# Altium PCB link_pcb_3.PcbDoc
Units mil, origin at the board's own origin, x right, y up, seen from the top; angles counter-clockwise.
Board outline 1980 x 700 mil, 2 copper layers (Top Layer, Bottom Layer); 38 components, 29 nets, 108 pads, 24 vias.
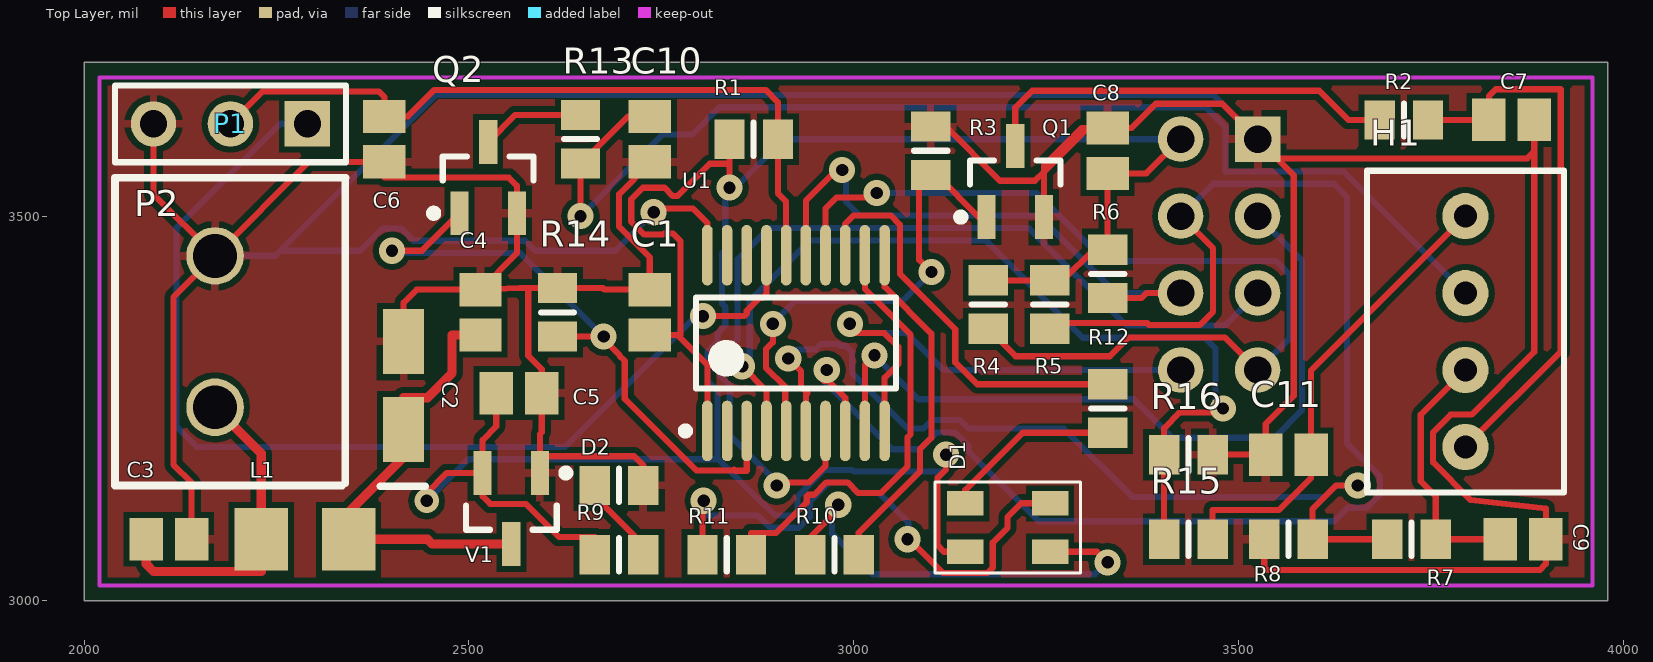
[diagram p0: Top Layer view]
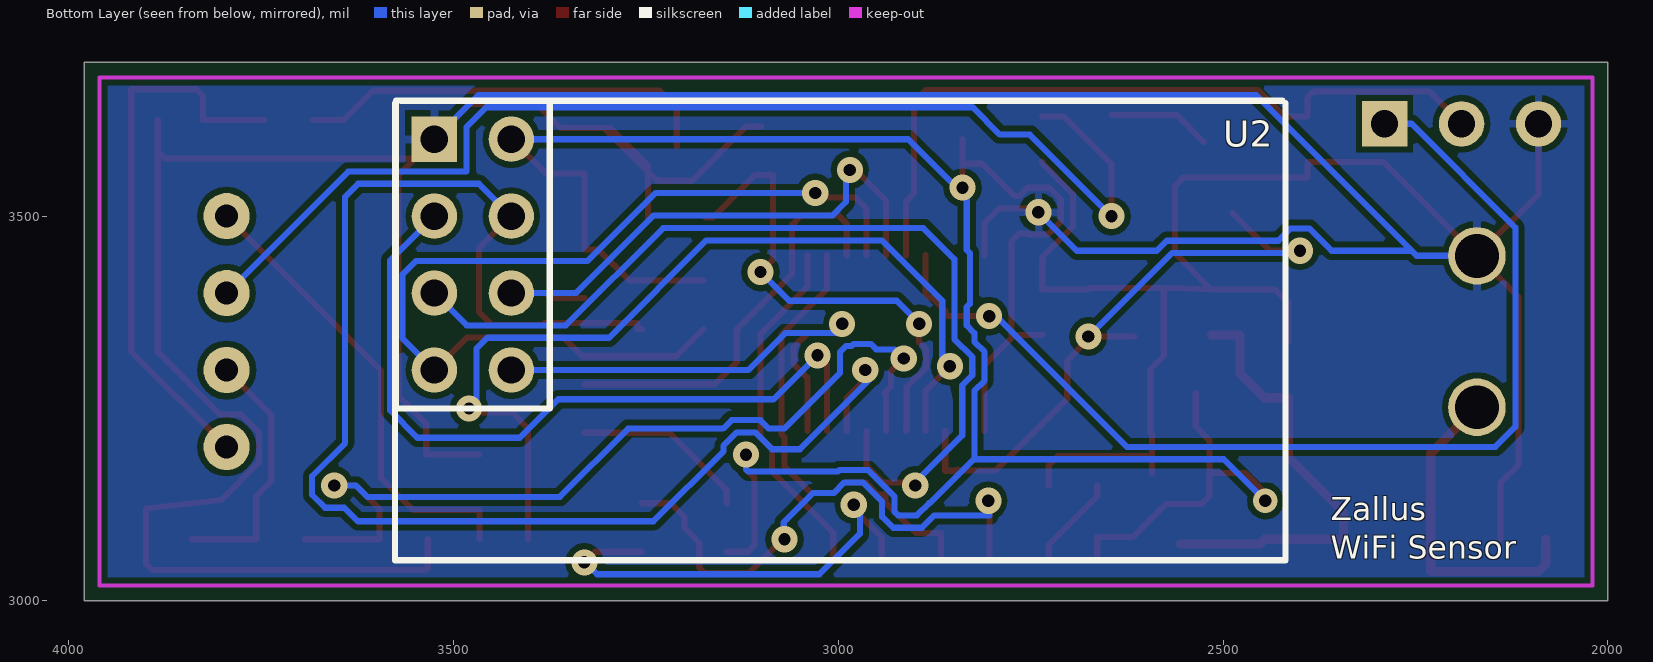
[diagram p1: Bottom Layer view, seen from below]

## Layer stack, top to bottom
Top Layer: signal copper 1.4
Dielectric: dielectric 12.6, FR-4, Dk 4.8
Bottom Layer: signal copper 1.4

## Board outline
2000,3000 3980,3000 3980,3700 2000,3700

## Design rules (kind name [scope] priority, off if disabled: settings)
Clearance [All] p1: gap=8
HoleToHoleClearance [All] p1: gap=20 allowstackedmicrovias=TRUE
MinimumSolderMaskSliver [All] p1: minsoldermaskwidth=6
PolygonConnect [All] p1: connectstyle=Relief reliefconductorwidth=10 reliefentries=4 polygonreliefangle="90 Angle"
RoutingVias [All] p1: holewidth=16 width=34 viastyle="Through Hole" minholewidth=28 minwidth=50 maxholewidth=28 maxwidth=50
SilkToSilkClearance [All] p1: silktosilkclearance=0
SilkscreenOverComponentPads [All] p1: minsilkscreentomaskgap=0
SolderMaskExpansion SolderMaskExpansion_1 [InComponent('U1')] p1: expansion=6
SolderMaskExpansion [All] p2: expansion=4
Width [InNet('VP1_REG')] p1: maxlimit=12 minlimit=10 preferedwidth=12 minimp=50.000000 maximp=50.000000 favimp=50.000000
Width Width_3 [InNet('VP1')] p2: maxlimit=12 minlimit=10 preferedwidth=12 minimp=50.000000 maximp=50.000000 favimp=50.000000
Width Width_2 [InNet('LSD02_OUT')] p3: maxlimit=8 minlimit=8 preferedwidth=8
Width Width_5 [InNet('EXTERNAL_SW')] p4: maxlimit=8 minlimit=8 preferedwidth=8
Width Width_4 [InNet('3.3V')] p5: maxlimit=8 minlimit=8 preferedwidth=8
Width Width_1 [All] p6: maxlimit=20 minlimit=6 preferedwidth=8 minimp=50.000000 maximp=50.000000 favimp=50.000000
24 further rules are at their usual default settings.

## Components (designator, comment, footprint, x,y, rotation, side; value= is the part's Value field where it differs from the comment)
C1 "Cap" C0805 2735,3375 r270 top
C2 "Cap Pol1" 1206_C 2415,3280 r90 top
C3 "Cap" C0805 2110,3080 r180 top
C4 "Cap" C0805 2515,3375 r270 top
C5 "Cap" C0805 2565,3270 r180 top
C6 "Cap" C0805 2390,3600 r90 top
C7 "Cap" C0805 3855,3625 r180 top
C8 "Cap" C0805 3330,3585 r270 top
C9 "Cap" C0805 3870,3080 r180 top
C10 "Cap" C0805 2735,3600 r90 top
C11 "Cap" C0805 3565,3190 r0 top
D1 "SMT RGB LED" CLV1A-FKB_RGB 3145,3115 r0 top
D2 "LED3" 6-0805_L 2695,3150 r0 top
H1 "term_con" A98335-ND 3795,3200 r90 top
L1 "FB" 1206_IMP 2230,3080 r0 top
P1 "Programing" HDR1X3 2290,3620 r180 top
P2 "Bat_SW" 5mm_2TERM 2170,3350 r270 top
Q1 "2N7002P" SOT-23_M 3210,3545 r90 top
Q2 "2N7002P" SOT-23_M 2525,3550 r90 top
R1 "Res1" 6-0805_L 2870,3600 r0 top
R2 "Res1" 6-0805_L 3715,3625 r180 top
R3 "Res1" 6-0805_L 3100,3585 r90 top
R4 "Res1" 6-0805_L 3175,3385 r90 top
R5 "Res1" 6-0805_L 3255,3385 r90 top
R6 "Res1" 6-0805_L 3330,3425 r90 top
R7 "Res1" 6-0805_L 3725,3080 r180 top
R8 "Res1" 6-0805_L 3565,3080 r180 top
R9 "Res1" 6-0805_L 2695,3060 r0 top
R10 "Res1" 6-0805_L 2975,3060 r0 top
R11 "Res1" 6-0805_L 2835,3060 r0 top
R12 "Res1" 6-0805_L 3330,3250 r90 top
R13 "Res1" 6-0805_L 2645,3600 r90 top
R14 "Res1" 6-0805_L 2615,3375 r90 top
R15 "Res1" 6-0805_L 3435,3080 r180 top
R16 "Res1" 6-0805_L 3435,3190 r0 top
U1 "MSP430G2553" TSOP65P640-20AM 2925,3335 r90 top
U2 "nRF24L01_Wireless" NRF24L01 3525,3600 r0 bottom
V1 "MCP1702 3.3V Reg" SOT-23B_M 2555,3120 r270 top

## Footprints (in the part's own frame and the unit in brackets; to place one, negate y for a bottom-side part, rotate by r counter-clockwise, add the part's x,y. Pads: shape width x height; smd on the part's side, far side on the other; paste and mask are expansions set on the pad)
5mm_2TERM [mm]
  round 1.9 hole 1.45: 1(-2.5,0) 2(2.5,0)
  silkscreen extent -5.08,-3.3 5.08,4.32
6-0805_L [mm] "Chip Resistor, Body 2.0x1.2mm, IPC High Density"
  rect 1x1.3 smd: 1(-0.8,0) 2(0.8,0)
  silkscreen extent 0,-0.55 0,0.55, body extent -1.07,-0.7 1.07,0.7, height 0.7
1206_C [mm] "1206_Cap"
  rect 2.15x1.35 smd: 1(-1.45,0) 2(1.45,0)
  silkscreen extent -3.33,-0.71 -3.33,0.76
1206_IMP [mil] "1206 Imperial"
  rect 69.5x81 smd: 1(0,0) 2(113.5,0)
A98335-ND [mil]
  round 60 hole 30: 1(0,0) 2(100,0) 3(200,0) 4(300,0)
  silkscreen extent -59,-128 359,128
C0805 [mm] "Chip Capacitor, Body 2.0x1.3mm, IPC High Density"
  rect 1.1x1.4 smd: 1(-0.75,0) 2(0.75,0)
  body extent -1.1,-0.72 1.1,0.72, height 1.4
CLV1A-FKB_RGB [mm]
  rect 1.2x0.8 smd: 1(0,0.3) 2(0,-1.3) 3(2.8,-1.3) 4(2.8,0.3)
  silkscreen extent -1,-2 3.8,1
HDR1X3 [mm] "Connector; Header; 3 Position"
  rect 1.5x1.5 hole 0.9: 1(0,0)
  round 1.5 hole 0.9: 2(2.54,0) 3(5.08,0)
  silkscreen extent -1.27,-1.27 6.35,1.27
NRF24L01 [mm]
  rect 1.5x1.5 hole 0.9: 1(0,0)
  round 1.5 hole 0.9: 2(-2.54,0) 3(0,2.54) 4(-2.54,2.54) 5(0,5.08) 6(-2.54,5.08) 7(0,7.62) 8(-2.54,7.62)
  silkscreen extent -28.1,-1.27 1.3,13.9
SOT-23_M [mm] "SOT23, 3-Leads, Body 2.9x1.3mm, Pitch 0.95mm, Lead Span 2.5mm, IPC Low Density"
  rect 1.45x0.6 smd: 1(-1.175,0.95) 2(-1.175,-0.95) 3(1.175,0)
  silkscreen extent -1.3,-1.5 0.7,1.92, body extent -0.7,-1.5 0.7,1.5, height 1.1
SOT-23B_M [mm] "SOT23, 3-Leads, Body 2.9x1.3mm, Pitch 0.95mm, Lead Span 2.4mm, IPC Low Density"
  rect 1.45x0.6 smd: 1(-1.175,0.95) 2(-1.175,-0.95) 3(1.175,0)
  silkscreen extent -1.3,-1.5 0.7,1.93, body extent -0.7,-1.5 0.7,1.5, height 1.14
TSOP65P640-20AM [mm] "TSOP, 20-Leads, Body 6.5x4.4mm, Pitch 0.65mm, IPC Low Density"
  oval 2x0.35 smd: 1(-2.9,2.925) 2(-2.9,2.275) 3(-2.9,1.625) 4(-2.9,0.975) 5(-2.9,0.325) 6(-2.9,-0.325) 7(-2.9,-0.975) 8(-2.9,-1.625) 9(-2.9,-2.275) 10(-2.9,-2.925) 11(2.9,-2.925) 12(2.9,-2.275) 13(2.9,-1.625) 14(2.9,-0.975) 15(2.9,-0.325) 16(2.9,0.325) 17(2.9,0.975) 18(2.9,1.625) 19(2.9,2.275) 20(2.9,2.925)
  silkscreen extent -3.02,-3.3 1.5,3.77, body extent -2.25,-3.3 2.25,3.3, height 1.1

## Part data
C1 C3 C4 C5 C6 C7 C8 C9 C10 C11: "Capacitor"
C2: "Polarized Capacitor (Radial)"
D1: library part RGB_LED_SMT
D2: "Typical BLUE SiC LED"
H1: library part A98335ND_v1
L1: library part Inductor, "Inductor"
P1: library part "Header 3", "Header, 3-Pin"
P2: library part MHDR1X2, "Header, 2-Pin"
R1 R2 R3 R4 R5 R6 R7 R8 R9 R10 R11 R12 R13 R14 R15 R16: "Resistor"
V1: library part MCP1700, "MCP1700 3.3V REG"

## Via types
v1: diameter 34, hole 16, Top Layer to Bottom Layer, 23 vias
v2: diameter 32, hole 16, Top Layer to Bottom Layer, 1 vias

## Nets (pads, with @x,y where several pads share a name; then routed paths per layer and width w, separated by ;. In a path a pad name is that pad's centre, name@x,y a point inside that pad or via, vN(x,y) a via of type N, cw(c..) or ccw(c..) an arc to the next point about the centre after c; other vN are vias at no path point)
3.3V: C1.2 C5.2 C8.2 D1.2 R1.1 R4.2 R5.2 R6.2 R9.1 U1.1 U2.2 V1.2 | length 3371.4
  Top Layer w8: v2(2445,3130) 2445,3140 2471.26,3166.26 V1.2 ; C5.2 2535.47,3226.87 2517.6,3209 V1.2 ; R9.1 2663.5,3083 2617,3083 2574,3126 2527.6,3126 2517.6,3136 V1.2 ; C1.2 2771.24,3345.47 ; U1.1 2809.84,3306.87 2771.24,3345.47 ; v1(2838.5,3537) v1@2838.5,3544.5 ; R1.1 2838.5,3568 ; v1@2846,3537 v1@2838.5,3544.5 ; v1(3120,3190) 3120,3171 3109,3160 3109,3072 3117.18,3063.82 D1.2 ; R4.2 R5.2 3272,3416.5 3312,3456.5 R6.2 C8.2 3380.47,3555.47 U2.2 ; 2771.24,3345.47 2774.95,3345.47 2774.95,3467.66 2765,3477.61 2753.62,3477.61 2752.01,3476 2727.99,3476 2711,3492.99 2711,3522.01 2725.81,3536.82 2754.19,3536.82 2765.01,3526 2771,3526 2813,3568 2838.5,3568 ; v1@2838.5,3544.5 2838.5,3568
  Bottom Layer w8: v2(2445,3130) 2499,3184 2822,3184 2823,3185 ; v1(2838.5,3537) 2833,3531.5 2833,3456 2829,3452 2829,3386.01 2833,3382.01 2833,3357.99 2823,3347.99 2823,3336.64 2810,3323.64 2810,3286.36 2823,3273.36 2823,3185 ; v1@2846,3537 2909,3600 U2.2 ; v1(3120,3190) 3120,3171 3117,3168 3000.64,3168 2998.64,3170 2961.36,3170 2927,3135.64 2927,3115.99 2922.01,3111 2897.99,3111 2881.99,3127 2881,3127 2823,3185
COFFEE_ON: Q1.1 R3.1 U1.5 | length 639.1
  Top Layer w8: v1(2895,3360) 2895,3336.01 2886,3327.01 2886,3302.99 2911,3277.99 2911,3222.03 U1.5 ; v1@2895,3365 v1@2899,3365 ; v1(3101,3427.38) 3085,3443.38 3085,3553.5 R3.1 3108,3553.5 3162.76,3498.74 3162.76,3498 3172.6,3498 Q1.1
  Bottom Layer w8: v1(2895,3360) 2895,3365 2899,3365 2924,3390 3063.62,3390 v1(3101,3427.38)
COFFEE_STATUS: R7.2 R8.1 U1.6 | length 1184.5
  Top Layer w8: v1@2920,3315 v1(2915,3315) 2931.57,3298.43 2931.57,3278.43 2940,3270 2937.8,3267.8 U1.6 ; v1(3655,3150) 3627,3150 3596.5,3119.5 R8.1 R7.2
  Bottom Layer w8: v1@2920,3315 v1(2915,3315) 2926.71,3326.71 2950.7,3326.71 2957.99,3334 2979.99,3334 2982.99,3331 2990.01,3331 2998,3323.01 2998,3296 3070,3224 3090.36,3224 3101.36,3235 3138.64,3235 3149.64,3224 3273,3224 3362,3135 3612,3135 3627,3150 v1(3655,3150)
DI02: R15.2 R16.1 U1.4 | length 1219.4
  Top Layer w8: v1(2855,3305) 2855,3304.61 2886.61,3273 U1.4 ; R15.2 R16.1 3403.5,3224.5 3424,3245 3475,3245 v1(3480,3250)
  Bottom Layer w8: v1(2855,3305) 2855,3304.61 2865,3294.61 2865,3390 2943.38,3468.38 3171.62,3468.38 3298,3342 3456,3342 3470,3328 3470,3255 3475,3250 v1(3480,3250)
DI02_OUT: C11.2 H1.4 R15.1 | length 606.5
  Top Layer w8: R15.1 3466.5,3118 3552.53,3118 3594.53,3160 C11.2 3594.53,3299.53 H1.4
EXTERNAL_RLY: C9.2 H1.2 R7.1 | length 336.1
  Top Layer w8: H1.2 3737,3242 3737,3155.5 3756.5,3136 R7.1 C9.2
EXTERNAL_SW: C7.2 H1.1 R2.1 | length 723.6
  Top Layer w8: R2.1 C7.2 3825.47,3656 3834.47,3665 3919,3665 3919,3324 H1.1
GND: C1.1 C2.2 C3.1 C4.1 C5.1 C6.1 C7.1 C8.1 C9.1 C10.1 C11.1 D2.2 P1.3 P2.1 Q1.2 Q2.2 R3.2 R8.2 R14.2 R16.2 U1.20 U2.1 V1.1 | length 7015.8
  Top Layer w8: P1.3 2090,3528.43 P2.1 ; C3.1 2139.53,3153.47 2116,3177 2116,3394.43 P2.1 ; C2.2 2415,3387.53 2432,3404.53 C4.1 ; V1.1 V1.1@2592.4,3188 ; D2.2 2726.5,3176 2714.5,3188 V1.1@2592.4,3188 ; C10.1 2735,3568.64 2695,3528.64 2695,3486.36 2735,3446.36 C1.1 2675.97,3404.53 2674,3406.5 R14.2 2577,3406.5 ; v1(2740,3505) 2745,3510 2791,3510 2809.84,3491.16 U1.20 ; R3.2 3119.5,3616.5 3190,3546 3235.47,3546 3247.4,3557.93 ; Q1.2 3247.4,3557.93 ; R16.2 C11.1 3535.47,3230 3572,3266.53 3572,3553 U2.1@3550,3575 ; R8.2 3533.5,3042 3535.5,3040 3891.53,3040 3899.53,3048 C9.1 3899.53,3120 3802,3131 3753,3180 3753,3219 3776,3242 3803,3242 3884.53,3323.53 3884.53,3584 ; C7.1 3884.53,3584 ; P2.1 2292.05,3570.47 C6.1 2390,3550 2552,3550 2562.4,3539.6 Q2.2 2562.4,3451.93 C4.1 ; C4.1 2565.97,3406.5 2577,3406.5 ; 2577,3406.5 2577,3318.53 2594.53,3301 C5.1 2594.53,3219.13 2592.4,3217 V1.1@2592.4,3188 ; 3247.4,3557.93 3247.4,3565.93 3296,3614.53 C8.1@3304,3614.53 ; 3247.4,3557.93 C8.1@3304,3614.53 ; C8.1@3304,3614.53 C8.1 3361,3614.53 3392.47,3646 3479,3646 U2.1 U2.1@3550,3575 ; U2.1@3550,3575 3875.53,3575 3884.53,3584
  Bottom Layer w8: P2.1 2248.43,3448.43 2255,3455 ; v1@2745,3510 v1(2740,3505) 2690,3455 2586.13,3455 2573.13,3468 2428.01,3468 2412.01,3484 2387.99,3484 2358.99,3455 2255,3455 ; U2.1 3467.47,3657.53 2457.53,3657.53 2255,3455
IRQ: U1.10 U2.8 | length 661.6
  Top Layer w8: v1(2995,3360) 2995,3348.82 2994.18,3348 3040,3348 3057.84,3330.16 3057.84,3307.68 3040.16,3290 U1.10
  Bottom Layer w8: v1(2995,3360) 2995,3348.82 2994.91,3348.73 2995.64,3348 3069,3348 3117,3300 U2.8
LED_B: R10.2 U1.11 | length 453.4
  Top Layer w8: R10.2 3006.5,3088.5 3085.99,3168 3085.99,3197 3100.91,3211.92 3100.91,3347.25 3040.16,3408 U1.11
LED_G: R11.2 U1.12 | length 584.3
  Top Layer w8: R11.2 2866.5,3088 2899.01,3088 2939,3127.99 2939,3136 2941,3138 2948.63,3138 2964.63,3154 2992.01,3154 3006.01,3140 3035,3140 3069.99,3174.99 3069.99,3212.56 3074,3216.57 3074,3346 3014.57,3405.43 U1.12
LED_R: R12.2 U1.13 | length 540
  Top Layer w8: U1.13 2988.98,3489.98 3000,3501 3048,3501 3060,3489 3060,3425 3132,3353 3132,3310 3160.5,3281.5 R12.2
LSD02: Q2.1 R14.1 U1.3 | length 889.3
  Top Layer w8: v1(2400,3455) 2438.86,3455 Q2.1 ; v1(2675,3343.5) R14.1 2671.5,3343.5 2695.44,3319.56 2695.44,3318.85 2702.47,3311.82 2702.47,3262.53 2795.54,3169.46 2843.26,3169.46 2844.4,3170.6 2846,3169 2861.02,3169 U1.3
  Bottom Layer w8: v1(2400,3455) 2403,3452 2566.5,3452 v1(2675,3343.5)
LSD02_OUT: C10.2 H1.3 R13.1 | length 1526.4
  Top Layer w8: v1(2645,3500) R13.1 2646.01,3568.5 2707.03,3629.53 C10.2
  Bottom Layer w8: v1(2645,3500) 2751,3606 2790,3606 2825.53,3641.53 3457.47,3641.53 3483,3616 3483,3558 3637,3558 H1.3
MISO: R4.1 U1.14 U2.7 | length 1249.8
  Top Layer w8: U1.14 2963.39,3510 2977.68,3524.3 3024.3,3524.3 v1(3030,3530) ; R4.1 3210.5,3318 3333,3318 3357.47,3342.47 3482.53,3342.47 U2.7
  Bottom Layer w8: v1(3030,3530) 3237.69,3530 3326.16,3441.53 3549,3441.53 3566.53,3424 3566.53,3341.53 U2.7
MOSI: R6.1 U1.15 U2.6 | length 770.6
  Top Layer w8: U1.15 2937.8,3520 2971.8,3554 2990,3554 2985,3559 v1(2985,3560) ; R6.1 3374,3393.5 3380.5,3400 U2.6
  Bottom Layer w8: v1(2985,3560) 2990,3555 2990,3518.38 3007.69,3500.69 3240.31,3500.69 3341,3400 U2.6
NCE: U1.9 U2.3 | length 994.2
  Top Layer w8: U1.9 3014.57,3306.57 v1(3027,3319)
  Bottom Layer w8: v1(3027,3319) 3084,3262 3364,3262 3414,3212 3547,3212 3582.53,3247.53 3582.53,3442.47 U2.3
NCS: R5.1 U1.8 U2.4 | length 1969.8
  Top Layer w8: v1@2975,3300 2961,3286 2966.98,3286 2988.98,3264 U1.8 ; R5.1 3261,3353.5 3261,3361 3381.47,3361 3384,3358.47 3449.47,3358.47 3467,3376 3467,3458 U2.4
  Bottom Layer w8: v1@2975,3300 2961,3286 3050,3197 3085.99,3197 3107.99,3219 3132.01,3219 3149,3202.01 3149,3194.68 3240.27,3103.41 3624.41,3103.41 3642,3121 3667.01,3121 3684,3137.99 3684,3162.01 3641,3205.01 3641,3525 3624,3542 3467,3542 U2.4
  other v1: 2965,3300
NetD1_1: D1.1 R12.1 | length 233.1
  Top Layer w8: D1.1 3145,3144.02 3219.49,3218.5 R12.1
NetD1_3: D1.3 R10.1 | length 588.5
  Top Layer w8: R10.1 2943.5,3082.5 2980,3119 v1(2980,3125) ; D1.3 3316.18,3063.82 v1(3330,3050)
  Bottom Layer w8: v1(2980,3125) 2980,3119 2972,3111 2972,3087 3024.5,3034.5 3313.5,3034.5 v1@3330,3051
NetD1_4: D1.4 R11.1 | length 712.5
  Top Layer w8: R11.1 2803.5,3128.5 v1(2805,3130) ; v1(3070,3080) 3072.48,3080 3116.41,3036.07 3173.59,3036.07 3180.62,3043.1 3180.62,3075.62 3200,3095 3200,3109 3217.81,3126.81 D1.4
  Bottom Layer w8: v1(2805,3130) 2805,3112.5 2803.5,3111 2875.36,3111 2891.36,3095 2928.64,3095 2943,3109.36 2943,3129.01 2967.99,3154 2992.01,3154 3006.01,3140 3033,3140 3071,3102 3071,3081 v1(3070,3080)
NetD2_1: D2.1 R9.2 | length 116.1
  Top Layer w8: D2.1 2663.5,3135.99 2726.5,3073 R9.2
NetQ1_3: Q1.3 R2.2 | length 548.1
  Top Layer w8: Q1.3 3210,3641 3232,3663 3605,3663 3643,3625 R2.2
NetQ2_3: Q2.3 R13.2 | length 134.6
  Top Layer w8: Q2.3 2560.24,3631.5 R13.2
RST: C6.2 P1.2 R1.2 U1.16 | length 981.4
  Top Layer w8: P1.2 2232,3662 2383,3662 2390,3655 C6.2 2420.53,3629.53 2455,3664 2885.5,3664 2901.5,3648 R1.2 2901.5,3529.71 2912.2,3519 U1.16
SCLK: U1.7 U2.5 | length 1218.3
  Top Layer w8: v1(2900,3150) 2900,3154 2942,3154 2963.39,3175.39 U1.7
  Bottom Layer w8: v1(2900,3150) 2900,3154 2839,3215 2839,3279.99 2826,3292.99 2826,3317.01 2849,3340.01 2849,3444 2889.38,3484.38 3227.62,3484.38 3354,3358 3483,3358 U2.5
TEST: P1.1 U1.17 | length 1397
  Top Layer w8: v1(2804,3370) 2857.61,3370 2861,3373.39 2861,3377.01 2877.99,3394 2881.61,3394 2886.61,3399 U1.17
  Bottom Layer w8: P1.1 2255,3620 2120,3485 2120,3226 2146,3200 2625,3200 2795,3370 v1(2804,3370)
VP1: C3.2 L1.1 P2.2 | length 424.1
  Top Layer w12: C3.2 2080.47,3048 2090.47,3038 2230,3038 L1.1 2230,3191.57 P2.2
VP1_REG: C2.1 C4.2 L1.2 V1.3 | length 590.4
  Top Layer w12: C4.2 2478,3345.47 2478,3296 2446,3264 2415,3264 C2.1 2415,3186.5 2343.5,3115 L1.2 2446,3080 2452.26,3073.74 V1.3
pads on no net: U1.2 U1.18 U1.19

## Polygon pours and split planes (outlines as drawn)
GND on Bottom Layer "Bottom Layer-No Net" (solid, pour order 4): 2020,3680 3960,3680 3960,3020 2020,3020
GND on Top Layer "Top Layer-No Net" (solid, pour order 6): 2020,3680 3960,3680 3960,3020 2020,3020

## Keep-outs
Keep-Out Layer:
  lines w5: 2020,3020 3960,3020 3960,3680 2020,3680 2020,3020

## Silkscreen, mask and mechanical layers (free items; w line width, h text height)
Bottom Overlay:
  text "Zallus" at 2360,3105 h30
  text "WiFi Sensor" at 2360,3055 h30
Drill Drawing:
  text ".LEGEND" at 4180,3200 h60
  text "Drill Drawing." at 4180,3100 h60

## Dimensions
2020,3020 to 3960,3020 on Mechanical 1
2020,3020 to 2020,3680 on Mechanical 1